# EAGLE board TPS799 (EAGLE 9.5.2)
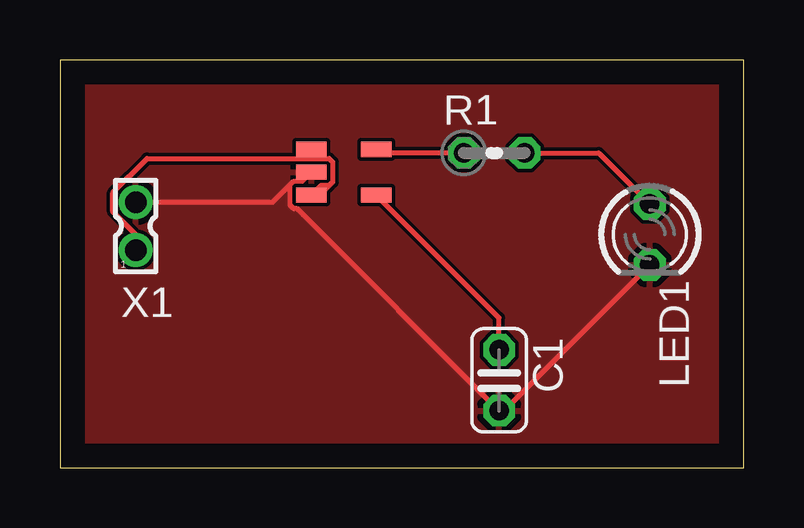
[diagram p0: board, top side]

Size 28.5 x 17 mm. Coordinates in mm from the lower left corner, seen from the top.
Outline: 0,0 28.5,0 28.5,17 0,17 0,0
Copper layers (1*16): Top 0.035mm / dielectric 1.5mm / Bottom 0.035mm
Design rules "default": minimum track width 6mil, minimum drill 0.35mm, track to track 6mil, track to pad 6mil, pad to pad 6mil, via to via 6mil, smd to smd 6mil, copper to edge 40mil, drill to drill 6mil, minimum pad ring 10mil, minimum via ring 8mil, stop-mask expansion 4mil, vias tented up to drill 0mil, thermal gap 10mil

## Footprints (pad centres in the part's own frame; a part is rotated, then mirrored left to right if it is on the bottom)
C025-024X044 = drill 0.813 octagon: 1 -1.27,0; 2 1.27,0
LED3MM = drill 0.813 octagon: A -1.27,0; K 1.27,0
0204V = drill 0.813 octagon: 1 -1.27,0; 2 1.27,0
TPS799 = smd 1.27 x 0.635: NE 2.7,1.9; NW 0,1.9; SE 2.7,0; SW 0,0; W 0,0.95
87758-0216 = drill 0.9 pad 1.27: 1 0,-1; 2 0,1

## Placement (x,y rotation side)
C1  [C025-024X044]  18.31,3.64 270 top
LED1  [LED3MM]  24.59,9.72 270 top
R1  [0204V]  18.11,13.12 0 top
U$1  TPS799  [TPS799]  10.48,11.37 0 top
X1  87758-0216  [87758-0216]  3.16,10.07 0 top

## Library data of the parts
C1 = rcl; SPICEPREFIX: C
LED1 = led
R1 = rcl; SPICEPREFIX: R
U$1 = TPS799
X1 = con-molex; MF: MOLEX; MPN: 87758-0216; OC_FARNELL: unknown; OC_NEWARK: 94M1513

## Nets
GND: C1.2 LED1.K U$1.W X1.2
N$1: R1.1 U$1.NE
N$2: LED1.A R1.2
N$3: C1.1 U$1.SE
N$4: U$1.NW U$1.SW X1.1

## Tracks (layer width: path | path; a pad name or v marks a point on that pad's centre or on a via)
GND
  Top 0.2: LED1.K 18.51,2.37 C1.2 9.88,10.8 9.74,10.8 9.59,10.95 9.59,11.79 | U$1.W 10.1,11.94 10,11.94 9.74,11.94 9.59,11.79 | X1.2 8.87,11.07 9.59,11.79
  pour Top: 0,17 0,0 28.5,0 28.5,17
N$1
  Top 0.2: R1.1 13.33,13.12 U$1.NE
N$2
  Top 0.2: R1.2 22.46,13.12 LED1.A
N$3
  Top 0.2: C1.1 18.31,6.24 U$1.SE
N$4
  Top 0.2: 10.86,12.89 3.63,12.89 2.2,11.47 2.2,10.67 3.16,9.72 X1.1 | 11.22,11.75 10.84,11.37 U$1.SW 10.86,11.75 11.22,11.75 | 11.22,11.75 11.37,11.9 11.37,12.74 11.22,12.89 10.86,12.89 | U$1.NW 10.86,12.89